# Altium PCB ESPSmartPlug1.PcbDoc
Units mm, origin at the board's own origin, x right, y up, seen from the top; angles counter-clockwise.
Board outline 55 x 30 mm, 2 copper layers (Top Layer, Bottom Layer); 39 components, 32 nets, 112 pads, 19 vias.
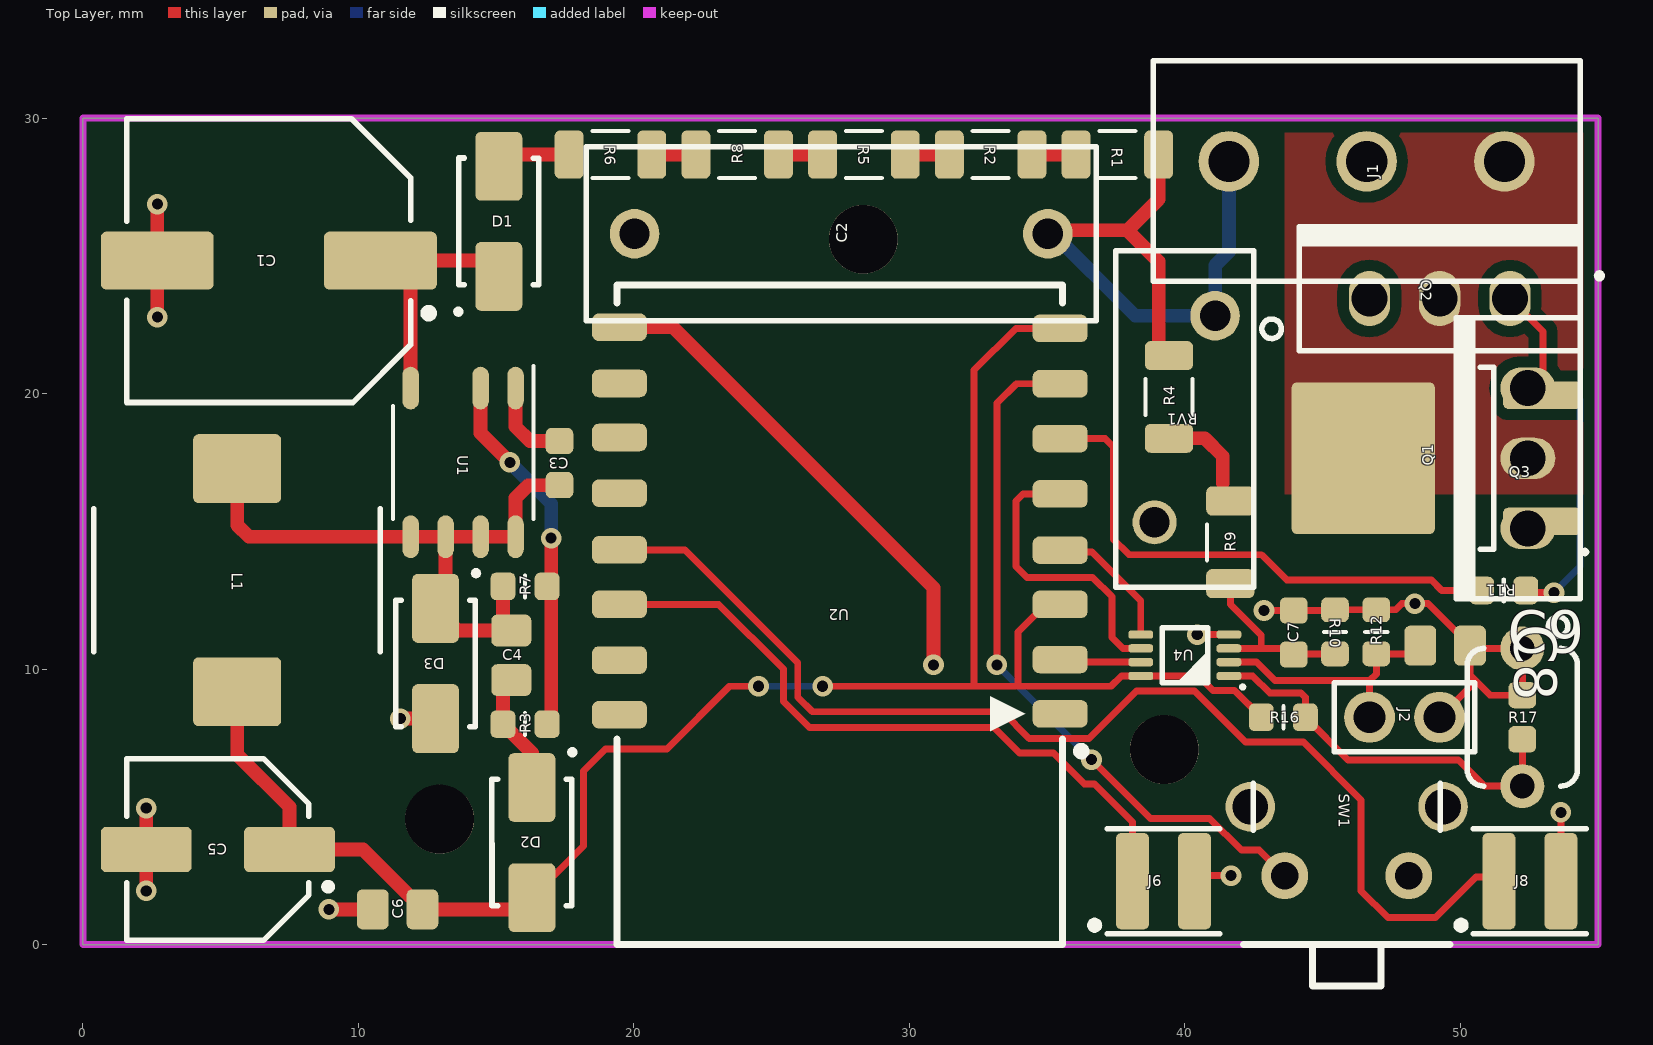
[diagram p0: Top Layer view]
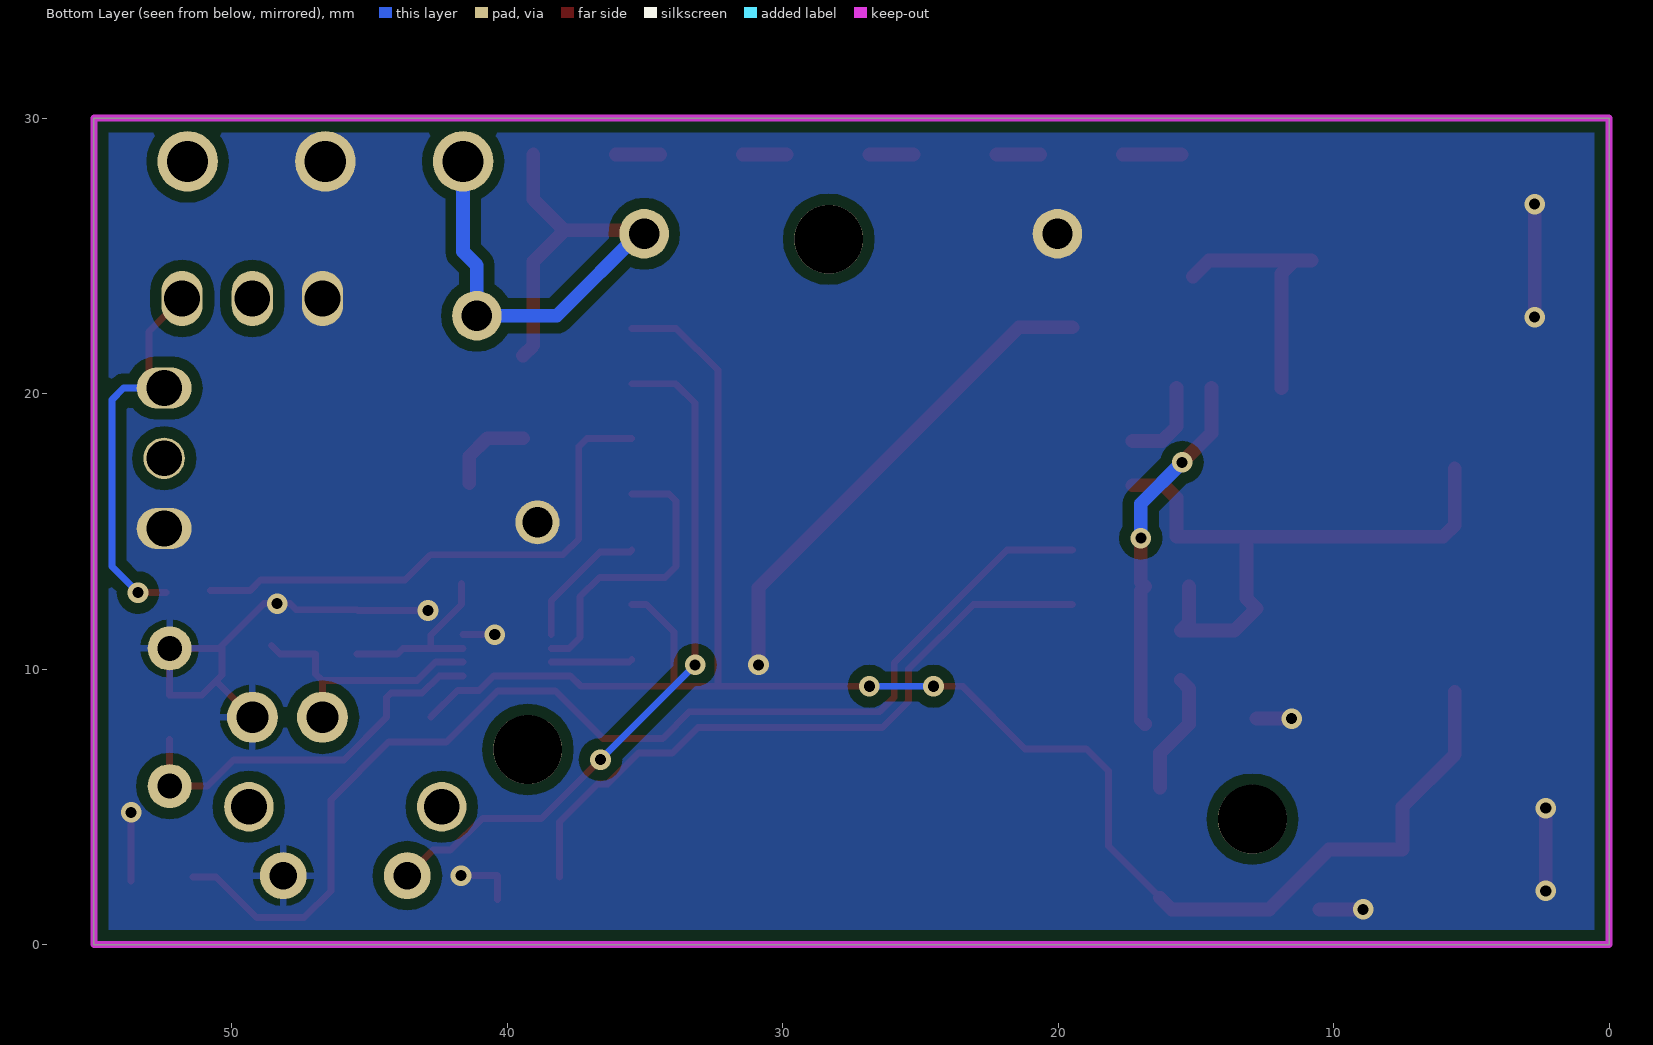
[diagram p1: Bottom Layer view, seen from below]
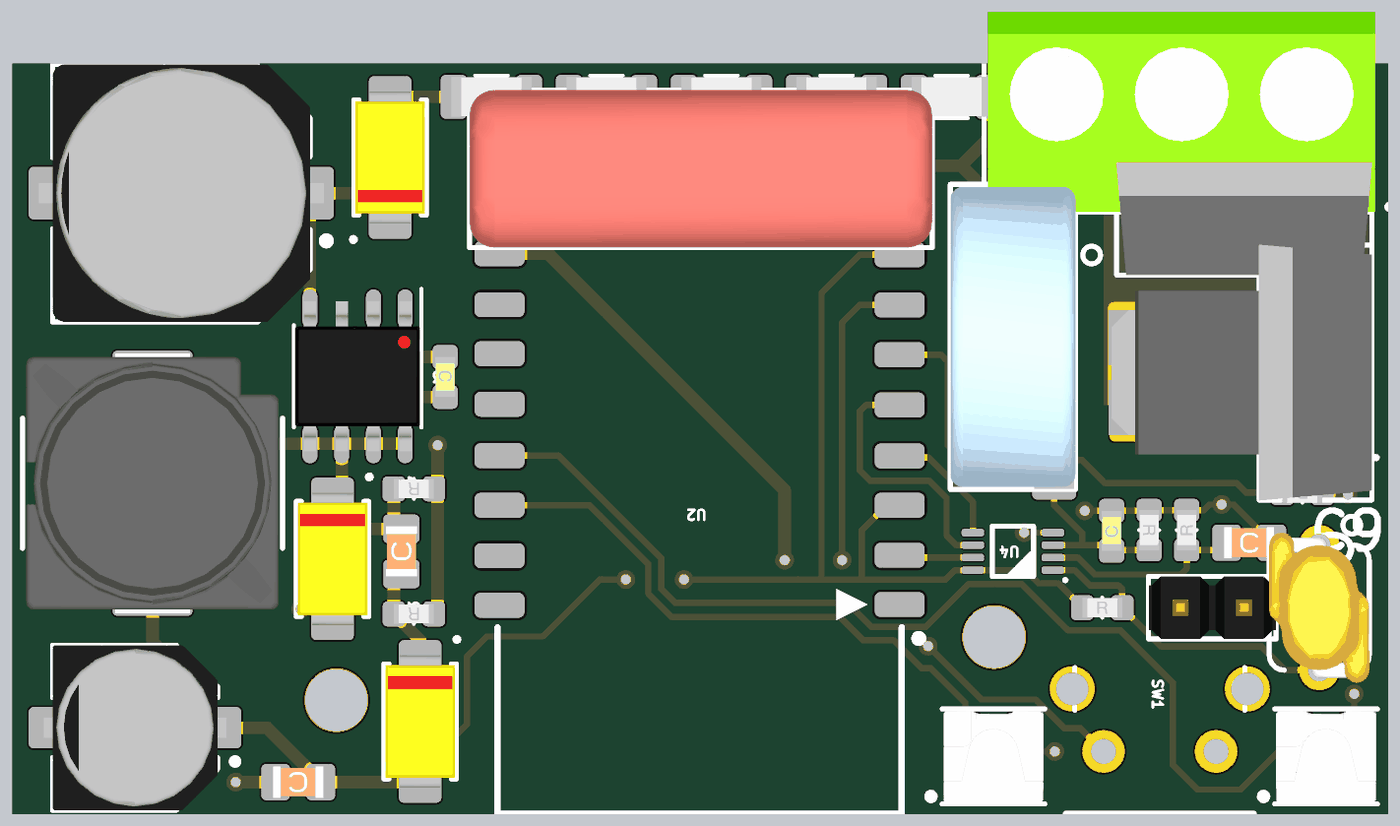
[diagram p2: 3D render of the assembled board from above, using the file's embedded part models]

## Layer stack, top to bottom
Top Solder: solder mask 0.0102, Solder Resist, Dk 3.5
Top Layer: signal copper 0.0356
Dielectric 1: dielectric 0.32, FR-4, Dk 4.8
Bottom Layer: signal copper 0.0356
Bottom Solder: solder mask 0.0102, Solder Resist, Dk 3.5

## Board outline
0,0 55,0 55,30 0,30

## Design rules (kind name [scope] priority, off if disabled: settings)
Clearance Clearance_110V_Keepout [InNetClass('110V') vs OnLayer('Keep-Out Layer')] p1: gap=0.3
Clearance Clearance_Q1Q2Q3 [(InComponent('Q1') OR InComponent('Q2') OR InComponent('Q3')) vs (InComponent('Q1') OR InComponent('Q2') OR InComponent('Q3'))] p2: gap=1
Clearance Clearance_110V_NoNet [InNetClass('110V') vs InNet('No Net')] p3: gap=0.5
Clearance Clearance_220V_110V [InNetClass('220V') vs InNetClass('110V')] p4: gap=1
Clearance Clearance_240VAC_220V [InNet('240VAC') vs InNetClass('220V')] p5: gap=1
Clearance Clearance_Poly [All vs InPolygon] p6: gap=0.4
Clearance Clearance_TrackAll [All vs IsTrack] p7: gap=0.2
Clearance Clearance_TrackU4 [InComponent('U4') vs IsTrack] p8: gap=0.25
Clearance Clearance_220V [InNetClass('220V')] p9: gap=2
Clearance Clearance_110V [InNetClass('110V')] p10: gap=1
Clearance [All] p11: gap=0.2
ComponentClearance [All] p1 off: gap=0.254 collisioncheckmode=3 verticalgap=0.254 showdistances=FALSE
Height [All] p1 off: minheight=0 maxheight=25.4 prefheight=12.7
PolygonConnect PolygonConnect_GND_Relief [InComponentClass('ReliefConnectGND')] p1: connectstyle=Relief reliefconductorwidth=0.254 reliefentries=4 polygonreliefangle="90 Angle" airgapwidth=0.254
PolygonConnect PolygonConnect_PLUGAC [InNet('PLUG1AC') And OnLayer('Top Layer')] p2: connectstyle=Direct reliefconductorwidth=0.254 reliefentries=4 polygonreliefangle="90 Angle" airgapwidth=0.254
PolygonConnect PolygonConnect_GND [InNet('GND') And OnLayer('Bottom Layer')] p3: connectstyle=Direct reliefconductorwidth=0.254 reliefentries=4 polygonreliefangle="90 Angle" airgapwidth=0.254
PolygonConnect [All] p4: connectstyle=Relief reliefconductorwidth=0.254 reliefentries=4 polygonreliefangle="90 Angle" airgapwidth=0.254
RoomDefinition ESPSmartPlug1 [InComponentClass('ESPSmartPlug1')] p1 off: confinementstyle=ConfineIn formatcopy=TRUE lockcomponents=FALSE outline 153.543,1.651 411.48,1.651 411.48,36.449 153.543,36.449
RoutingVias [All] p1: holewidth=0.711 width=1.27 viastyle="Through Hole" minholewidth=0.711 minwidth=1.27 maxholewidth=0.711 maxwidth=1.27
SolderMaskExpansion [All] p1: expansion=0.102
UnpouredPolygon [All] p1: allowunpoured=FALSE
Width [All] p1: maxlimit=5 minlimit=0.2 preferedwidth=0.5
27 further rules are at their usual default settings.

## Classes and differential pairs
component class ReliefConnectGND: J2 R17 SW1

## Components (designator, comment, footprint, x,y, rotation, side; value= is the part's Value field where it differs from the comment)
C1 "4.7uF" SMD_CAPAE1030X1050N 6.75,24.825 r180 top
C2 "47nF" PTH_CAPA1500-630X1850X1550 27.525,25.8 r180 top
C3 "100nF" SMD_0603_CAPC1608X95N 17.3,17.475 r270 top
C4 "22uF" SMD_0805_CAPC2012X95N 15.55,10.5 r90 top
C5 "100uF" SMD_CAPAE660X550N 4.9,3.45 r180 top
C6 "22uF" SMD_0805_CAPC2012X95N 11.425,1.275 r180 top
C7 "330pF" SMD_0603_CAPC1608X95N 43.95,11.325 r90 top
C8 "100nF" SMD_0805_CAPC2012X95N 49.45,10.85 r0 top
C9 "100nF" SMD_0603_CAPC1608X95N 52.25,8.25 r90 top
D1 "S1M" SMD_DO214AC_SMA 15.1,26.25 r90 top
D2 "S1M" SMD_DO214AC_SMA 16.3,3.7 r270 top
D3 "US1K" SMD_DO214AC_SMA 12.8,10.2 r270 top
J1 "CON_3PINS" PTH_HDRV03W11060P500_1X03 46.6,28.075 r180 top locked
J2 "CURRENT TRAF" PTH_HDRV02W64P254_1X02 47.975,8.25 r0 top
J6 "LED WIFI" SMD_LED_LAA67F 39.225,2.3 r0 top
J8 "LED RESERVE" SMD_LED_LAA67F 52.525,2.3 r0 top
L1 "680uH" SMD_INDC101101X480N 5.6,13.225 r270 top
Q1 "T405Q-600B" SMD_TO229P991X239-4N_DPAK 48.825,17.65 r180 top
Q2 "BT136-600D" PTH_TO220AB#1 49.25,23.8 r0 top
Q3 "BT136-600D" PTH_TO220AB#2 52.1,17.65 r90 top (schematic designator Q2)
R1 "330R" SMD_1206_RESC3216X102N 37.55,28.675 r0 top
R2 "330R" SMD_1206_RESC3216X102N 32.95,28.675 r0 top
R3 "2.21k" SMD_0603_RESC1608X55N 16.05,8 r180 top
R4 "470k" SMD_1206_RESC3216X102N 39.425,19.875 r90 top
R5 "330R" SMD_1206_RESC3216X102N 28.35,28.675 r0 top
R6 "330R" SMD_1206_RESC3216X102N 19.15,28.675 r0 top
R7 "2.21k" SMD_0603_RESC1608X55N 16.05,13 r180 top
R8 "330R" SMD_1206_RESC3216X102N 23.75,28.675 r180 top
R9 "470k" SMD_1206_RESC3216X102N 41.65,14.6 r90 top
R10 "100k" SMD_0603_RESC1608X55N 45.45,11.35 r270 top
R11 "82R" SMD_0603_RESC1608X55N 51.575,12.85 r180 top
R12 "82R" SMD_0603_RESC1608X55N 46.95,11.35 r90 top
R16 "4.7k" SMD_0603_RESC1608X55N 43.575,8.25 r0 top
R17 "NTC NTCLE100E3472JB0" PTH_CAPRR500W60L500T400H800A 52.25,8.25 r90 top
RV1 "S10K250 7.5mm" PTH_VAR_S10K275 40,19.075 r270 top
SW1 "BUTTON_3" PTH_SWI_TACT-TS6601V 45.875,5 r90 top
U1 "LNK304DN" SMD_SOIC127P600X175-7N 13.8,17.5 r270 top locked
U2 "ESP-12" SMD_MOD_ESP_12 35.475,8.375 r180 top locked
U4 "TS5A3359" SMD_SOT765-1_SOP50P310X100-8N 40,10.5 r180 top

## Footprints (in the part's own frame and the unit in brackets; to place one, negate y for a bottom-side part, rotate by r counter-clockwise, add the part's x,y. Pads: shape width x height; smd on the part's side, far side on the other; paste and mask are expansions set on the pad)
PTH_CAPA1500-630X1850X1550 [mm]
  round 1.8 hole 1.1 mask+0.075: 1(-7.5,0) 2(7.5,0)
  silkscreen extent -9.25,-3.15 9.25,3.15, body extent -9.25,-3.15 9.25,3.15, height 15.5
PTH_CAPRR500W60L500T400H800A [mm]
  round 1.6 hole 0.9 mask+0.075: 1(-2.5,0) 2(2.5,0)
  silkscreen extent -2.5,-2 2.5,2, body extent -3,-2 3,2, height 7.99
PTH_HDRV02W64P254_1X02 [mm]
  round 1.85 hole 1.15 mask+0.075: 1(-1.27,0) 2(1.27,0)
  silkscreen extent -2.55,-1.25 2.55,1.25, body extent -2.54,-1.25 2.54,1.25, height 8
PTH_HDRV03W11060P500_1X03 [mm]
  round 2.2 hole 1.5 mask+0.075: 1(-5,-0.35) 2(0,-0.35) 3(5,-0.35)
  silkscreen extent -8.65,-4 7.75,4, body extent -7.9,-4 7.6,4, height 11
PTH_SWI_TACT-TS6601V [mm]
  round 1.7 hole 1 mask+0.075: 1(-2.5,2.25) 2(-2.5,-2.25)
  round 1.8 hole 1.3 mask+0.075: 3(0,-3.5) 4(0,3.5)
  silkscreen extent -6.5,-3.75 0.85,3.75
PTH_TO220AB#1 [mm]
  oval 1.5x2 hole 1.3 mask+0.075: 1(-2.55,-0.35) 2(0,-0.35) 3(2.55,-0.35)
  silkscreen extent -6.45,-2.25 5.1,2.25, body extent -5.12,-2.25 5.12,2.26, height 19.2
PTH_TO220AB#2 [mm]
  oval 1.5x2 hole 1.3 mask+0.075: 1(-2.55,-0.35) 3(2.55,-0.35)
  oval 1.5x2 / inner oval 1.5x2 / far side round 1.5 hole 1.3 mask+0.075: 2(0,-0.35)
  silkscreen extent -6.45,-2.25 5.1,2.25, body extent -5.12,-2.25 5.12,2.26, height 19.2
PTH_VAR_S10K275 [mm]
  round 1.8 hole 1.1 mask+0.075: 1(-3.75,1.1)
  round 1.6 hole 1.1 mask+0.075: 2(3.75,-1.1)
  silkscreen extent -6.1,-2.5 6.1,2.5, body extent -6,-2.5 6,2.5, height 14.5
SMD_0603_CAPC1608X95N [mm]
  rrect42% 0.95x1 smd mask+0.075: 1(-0.8,0) 2(0.8,0)
  body extent -0.8,-0.4 0.8,0.4, height 0.95
SMD_0603_RESC1608X55N [mm]
  rrect44% 0.9x1 smd mask+0.075: 1(-0.8,0) 2(0.8,0)
  silkscreen extent 0,-0.4 0,0.4, body extent -0.8,-0.4 0.8,0.4, height 0.55
SMD_0805_CAPC2012X95N [mm]
  rrect35% 1.15x1.45 smd mask+0.075: 1(-0.9,0) 2(0.9,0)
  body extent -1,-0.62 1,0.63, height 1.25
SMD_1206_RESC3216X102N [mm]
  rrect38% 1.05x1.75 smd mask+0.075: 1(-1.5,0) 2(1.5,0)
  silkscreen extent -0.65,-0.85 0.65,0.85, body extent -1.6,-0.8 1.6,0.8, height 1.02
SMD_CAPAE660X550N [mm]
  rrect24% 3.3x1.65 smd mask+0.075: 1(-2.6,0) 2(2.6,0)
  silkscreen extent -4.13,-3.3 3.3,3.3, body extent -3.65,-3.3 3.65,3.3, height 5.5
SMD_CAPAE1030X1050N [mm]
  rrect19% 4.1x2.1 smd mask+0.075: 1(-4.05,0) 2(4.05,0)
  silkscreen extent -5.95,-5.15 5.15,5.15, body extent -5.7,-5.15 5.7,5.15, height 11
SMD_DO214AC_SMA [mm]
  rrect24% 2.5x1.7 smd mask+0.075: 1(-2,0) 2(2,0)
  silkscreen extent -3.46,-1.45 2.3,1.65, body extent -2.64,-1.39 2.64,1.4, height 2.29
SMD_INDC101101X480N [mm]
  rrect16% 2.5x3.2 smd mask+0.075: 1(-4.05,0) 2(4.05,0)
  silkscreen extent -2.6,-5.2 2.6,5.2, body extent -5.2,-5.05 5.2,5.05, height 4.8
SMD_LED_LAA67F [mm]
  rrect33% 1.2x3.5 smd mask+0.075: 1(-1.125,0) 2(1.125,0)
  silkscreen extent -2.77,-1.9 2.05,1.9, body extent -2,-1.8 2,1.8, height 4.2
SMD_MOD_ESP_12 [mm]
  rrect50% 2x1 smd: 1(0,0) 2(0,-1.97) 3(0,-3.97) 4(0,-5.94) 5(0,-7.98) 6(0,-9.99) 7(0,-11.98) 8(0,-13.99) 9(16,-14.03) 10(16,-11.99) 11(16,-10.03) 12(16,-8.01) 13(16,-5.95) 14(16,-3.97) 15(16,-1.95) 16(16,0.03)
  silkscreen extent -0.91,-15.57 16.08,8.37
SMD_SOIC127P600X175-7N [mm]
  oval 1.55x0.6 smd mask+0.075: 1(-2.7,1.905) 2(-2.7,0.635) 4(-2.7,-1.905) 5(2.7,-1.905) 6(2.7,-0.635) 7(2.7,0.635) 8(2.7,1.905)
  silkscreen extent -3.5,-2.55 2.05,2.55, body extent -3,-2.5 3,2.5, height 1.75
SMD_SOT765-1_SOP50P310X100-8N [mm]
  rrect67% 0.9x0.3 smd mask+0.05: 1(-1.6,0.75) 2(-1.6,0.25) 3(-1.6,-0.25) 4(-1.6,-0.75) 5(1.6,-0.75) 6(1.6,-0.25) 7(1.6,0.25) 8(1.6,0.75)
  silkscreen extent -2.22,-1 0.82,1.27
SMD_TO229P991X239-4N_DPAK [mm]
  rrect40% 2.85x1 smd mask+0.075: 1(-4.15,2.29) 3(-4.15,-2.29)
  rrect7% 5.2x5.5 smd paste-3.225 mask+0.075: 4(2.35,0)
  silkscreen extent -5.85,-3.3 -1.9,3.55, body extent -4.88,-3.27 4.88,3.27, height 2.38

## Part data
C1 C5: library part C_POL
C2: library part C, "47nF 310V"
C3 C4 C6 C7 C8 C9: library part C
D1 D2 D3: library part D
J2 J6 J8: library part CON_2PINS
L1: library part L
Q1: library part THYR_T11G3T24
Q2 Q3: library part THYR_T11T22G3
R1 R2 R3 R4 R5 R6 R7 R8 R9 R10 R11 R12 R16 R17: library part R
RV1: library part VARISTOR
U1: library part IC_LNK302-306D_SO-8C
U2: library part MOD_ESP-12
U4: library part IC_TS5A3359, "Analog Multiplexor 3-Channel"

## Free pads (board coordinates)
  round 2.5 hole 2.5: 0(12.95,4.55) 0(28.325,25.6) 0(39.25,7.075)

## Via types
v1: diameter 0.75, hole 0.4, Top Layer to Bottom Layer, tented both sides, 19 vias

## Nets (pads, with @x,y where several pads share a name; then routed paths per layer and width w, separated by ;. In a path a pad name is that pad's centre, name@x,y a point inside that pad or via, vN(x,y) a via of type N, cw(c..) or ccw(c..) an arc to the next point about the centre after c; other vN are vias at no path point)
3.3V: C5.1 C6.1 D2.2 L1.2 R16.1 U2.3 U2.8 U4.8 | length 67.6
  Top Layer w0.25: D2.2 18.175,3.575 18.175,6.3 18.975,7.1 21.2,7.1 23.475,9.375 v1(24.525,9.375) ; v1(26.85,9.375) 32.35,9.375 ; U2.3 34.945,12.345 33.95,11.35 33.95,9.375 ; U2.8 33.865,22.365 32.35,20.85 32.35,9.375 ; R16.1 41.8,9.225 41.025,9.225 40.5,9.75 U4.8 37.7,9.75 37.325,9.375 33.95,9.375 ; 32.35,9.375 33.95,9.375
  Top Layer w0.5: L1.2 5.6,6.9 7.5,5 C5.1 10.169,3.45 12.325,1.294 C6.1 15.875,1.275 D2.2
  Bottom Layer w0.25: v1(24.525,9.375) v1(26.85,9.375)
240VAC: C2.1 J1.3 R1.2 R4.2 RV1.1 | length 24.3
  Top Layer w0.5: C2.1@35.075,25.925 37.925,25.925 ; R1.2 39.05,27.05 37.925,25.925 ; R4.2 39.05,21.75 39.05,24.8 37.925,25.925
  Bottom Layer w0.5: C2.1@35.088,25.937 38.2,22.825 RV1.1 41.1,24.65 41.6,25.15 J1.3
BP: C3.1 U1.1 | length 3.2
  Top Layer w0.5: U1.1 15.705,18.795 16.225,18.275 C3.1
CURRENT: C8.1 J2.1 R12.1 U4.2 | length 9.5
  Top Layer w0.25: U4.2 42.6,10.25 43.27,9.58 46.705,9.58 ; J2.1 46.705,9.58 ; C8.1 48.25,10.55 R12.1 46.95,9.825 46.705,9.58
D: C1.1 D1.1 U1.4 | length 9.4
  Top Layer w0.5: C1.1 C1.1@11.425,24.825 ; U1.4 11.895,24.355 C1.1@11.425,24.825 ; D1.1 14.525,24.825 C1.1@11.425,24.825
FB: R3.1 R7.1 U1.2 | length 13.2
  Top Layer w0.5: U1.2 14.435,18.565 v1(15.5,17.5) ; R3.1 17,8.15 17,12.85 R7.1 ; R7.1@17,13.15 v1(17,14.75)
  Bottom Layer w0.5: v1(15.5,17.5) 17,16 v1(17,14.75)
GATE1: Q1.3 Q2.3 Q3.3 R11.1 | length 14.5
  Top Layer w0.25: Q2.3 53,22.25 Q1.3@53,19.94 ; R11.1@52.375,12.775 v1(53.4,12.775)
  Bottom Layer w0.25: Q3.3 53.925,20.2 54.35,19.775 54.35,13.725 v1(53.4,12.775)
GND: C1.2 C2.2 C5.2 C6.2 C7.2 C8.2 C9.2 D3.2 J1.2 J2.2 J6.2 J8.2 Q1.1 Q2.1 Q3.1 R10.1 R12.2 R17.2 RV1.2 SW1.2 U2.9 U4.4 | length 50.9
  Top Layer w0.25: J6.2@40.35,1.625 40.35,2.5 v1(41.675,2.5) ; v1(40.45,11.25) U4.4 ; v1(42.875,12.125) C7.2 45.425,12.125 R10.1 R12.2 47.65,12.15 47.875,12.375 48.825,12.375 C8.2 ; J2.2 50.55,9.555 ; J8.2 v1(53.65,4.8) ; C8.2 50.35,9.775 51.075,9.05 C9.2 R17.2 50.45,10.75 C8.2
  Top Layer w0.5: v1(2.3,1.95) C5.2 v1(2.3,4.95) ; v1(2.7,22.775) C1.2 v1(2.7,26.875) ; v1(8.925,1.275) C6.2 ; v1(11.525,8.2) D3.2 ; U2.9 21.42,22.405 30.875,12.95 v1(30.875,10.15)
  other v1: 48.35,12.375
GPIO0: U2.12
GPIO2: U2.11
GPIO4: J6.1 U2.14 | length 24.6
  Top Layer w0.25: U2.14 23.08,12.345 25.425,10 25.425,8.825 26.375,7.875 33.075,7.875 34,6.95 35.225,6.95 36.35,5.825 36.725,5.825 38.1,4.45 J6.1@38.1,2.45
GPIO5: J8.1 U2.13 | length 42.2
  Top Layer w0.25: U2.13 21.85,14.325 25.95,10.225 25.95,8.975 26.475,8.45 33.375,8.45 34.35,7.475 36.525,7.475 38.25,9.2 40.35,9.2 42.2,7.35 44.3,7.35 46.4,5.25 46.4,3.2 46.4,1.95 47.375,0.975 49.1,0.975 50.575,2.45 J8.1@51.4,2.45
GPIO12: R11.2 U2.6 | length 19.5
  Top Layer w0.25: U2.6 37.11,18.365 37.4,18.075 37.4,14.725 37.975,14.15 42.775,14.15 43.7,13.225 48.95,13.225 49.325,12.85 R11.2
GPIO13: SW1.1 U2.7 | length 25.7
  Top Layer w0.25: v1(33.175,10.15) 33.175,19.65 33.88,20.355 U2.7 ; v1(36.612,6.713) 38.75,4.575 40.9,4.575 42.05,3.425 42.7,3.425 SW1.1
  Bottom Layer w0.25: v1(33.175,10.15) v1(36.612,6.713)
GPIO14: U2.5 U4.6 | length 10.7
  Top Layer w0.25: U2.5 34.13,16.355 33.875,16.1 33.875,13.725 34.275,13.325 36.65,13.325 37.35,12.625 37.35,11.15 37.75,10.75 U4.6
GPIO15: U2.10
GPIO16: U2.4 U4.5 | length 4.9
  Top Layer w0.25: U2.4 35.54,14.25 36.625,14.25 38.4,12.475 U4.5
MEAS: U2.2 U4.7 | length 3
  Top Layer w0.25: U2.2 35.57,10.25 U4.7
NetC4_1: C4.1 D2.1 R3.2 | length 4.5
  Top Layer w0.5: C4.1 15.25,9.3 R3.2 16.3,6.95 D2.1
NetD1_2: D1.2 R6.1 | length 2.1
  Top Layer w0.5: D1.2@15.525,28.675 R6.1
NetR1_1: R1.1 R2.2 | length 1.6
  Top Layer w0.5: R2.2 R1.1
NetR2_1: R2.1 R5.2 | length 1.6
  Top Layer w0.5: R5.2 R2.1
NetR4_1: R4.1 R9.2 | length 3.2
  Top Layer w0.5: R4.1 40.725,18.375 41.375,17.725 41.375,16.75
NetR5_1: R5.1 R8.1 | length 1.6
  Top Layer w0.5: R8.1 R5.1
NetR6_2: R6.2 R8.2 | length 1.6
  Top Layer w0.5: R6.2 R8.2
PLUG1AC: J1.1 Q1.4 Q2.2 Q3.2
REST: U2.1
RXD: U2.15
S: C3.2 C4.2 D3.1 L1.1 R7.2 U1.5 U1.6 U1.7 U1.8 | length 23.1
  Top Layer w0.5: L1.1 5.6,15.225 6.025,14.8 U1.5 U1.6 ; R7.2 15.25,11.7 C4.2 13.6,11.4 D3.1 13.165,12.565 U1.6 ; C3.2 16.175,16.675 15.705,16.205 U1.8 U1.7 U1.6
TEMP_AMBIENT: C9.1 R16.2 R17.1 U4.1 | length 14.4
  Top Layer w0.25: U4.1 42.464,9.75 43.084,9.13 44.22,9.13 44.375,8.975 R16.2 45.925,6.7 49.925,6.7 50.875,5.75 R17.1 C9.1
TXD: U2.16
VOLTAGE: C7.1 R9.1 R10.2 U4.3 | length 6.7
  Top Layer w0.25: U4.3 42.775,10.75 ; R9.1 41.65,12.35 42.775,11.225 42.775,10.75 ; R10.2 43.975,10.55 43.775,10.75 42.775,10.75
pads on no net: SW1.3 SW1.4

## Polygon pours and split planes (outlines as drawn)
GND on Bottom Layer "Bottom" (solid, pour order 3): 0,0 55,0 55,30 0,30
PLUG1AC on Top Layer "PLUGAC" (solid, pour order 3): 55,16.35 55,30 43.625,30 43.625,16.35

## Keep-outs
Keep-Out Layer:
  the board outline again, w0.254

## Text inside footprints (layer, text, board x,y; h text height)
C1: Mechanical 3 "+" at 11.471,23.096 h0.4 r180
J1: Mechanical 3 "1" at 53.01,28.325 h0.4 r180
J2: Mechanical 3 "1" at 45.665,7.3 h0.4
U2: Mechanical 13 "ANTENNA AREA" at 35.348,0.501 h0.4 r180; Mechanical 13 "CUTOUT POLYGON" at 35.348,1.009 h0.4 r180